# Altium PCB CANPLC_IO.PcbDoc
Units mm, origin at the board's own origin, x right, y up, seen from the top; angles counter-clockwise.
Board outline 99 x 99 mm, 2 copper layers (Top Layer, Bottom Layer); 136 components, 118 nets, 415 pads, 17 vias.
Unrouted connection lines stored in the file: 137.
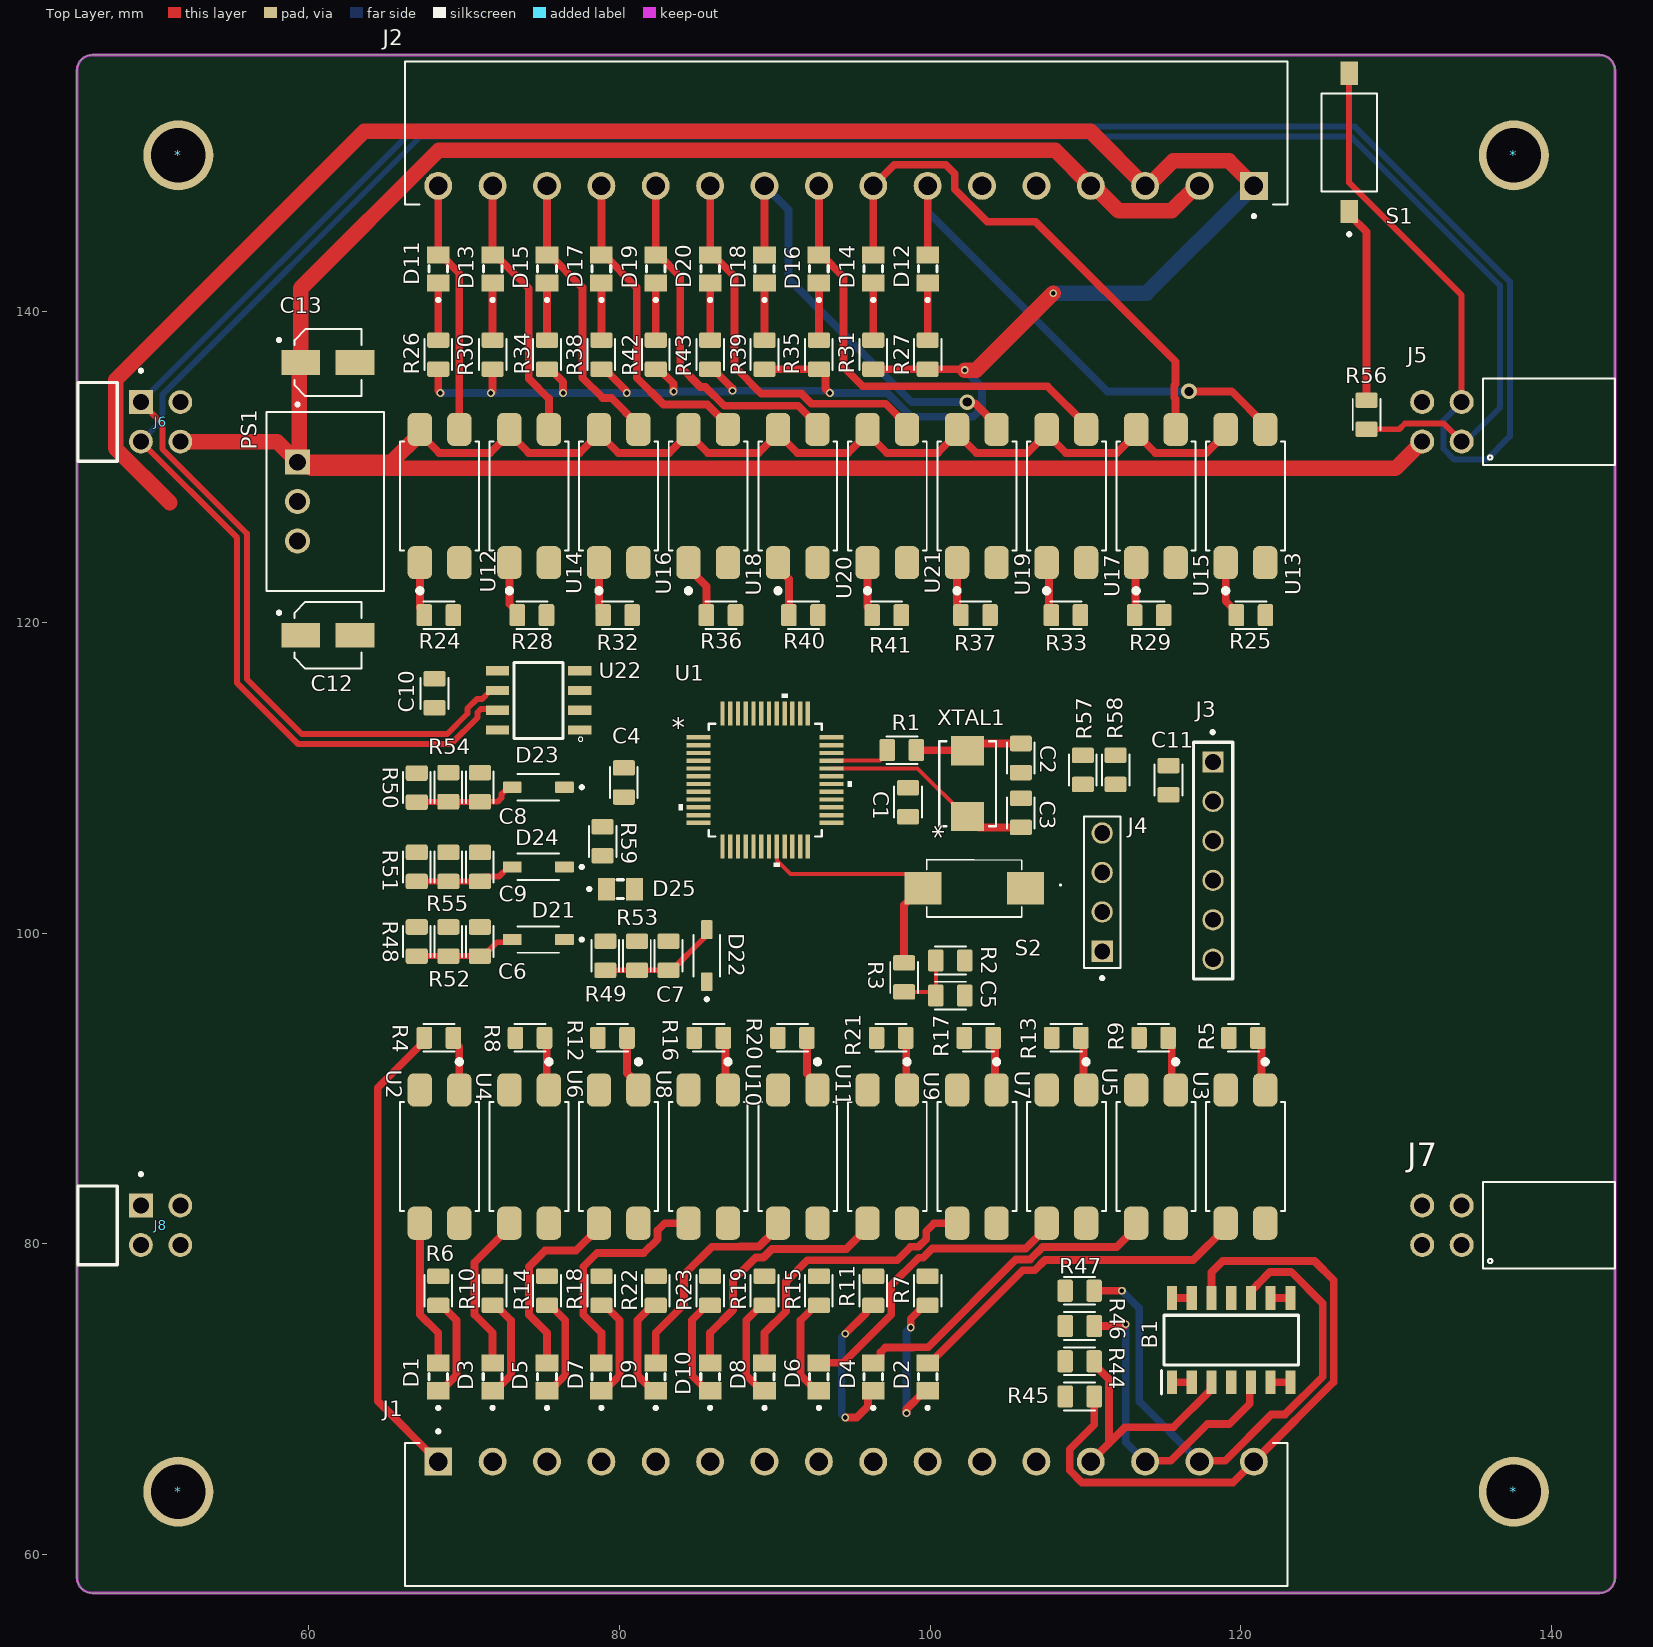
[diagram p0: Top Layer view]
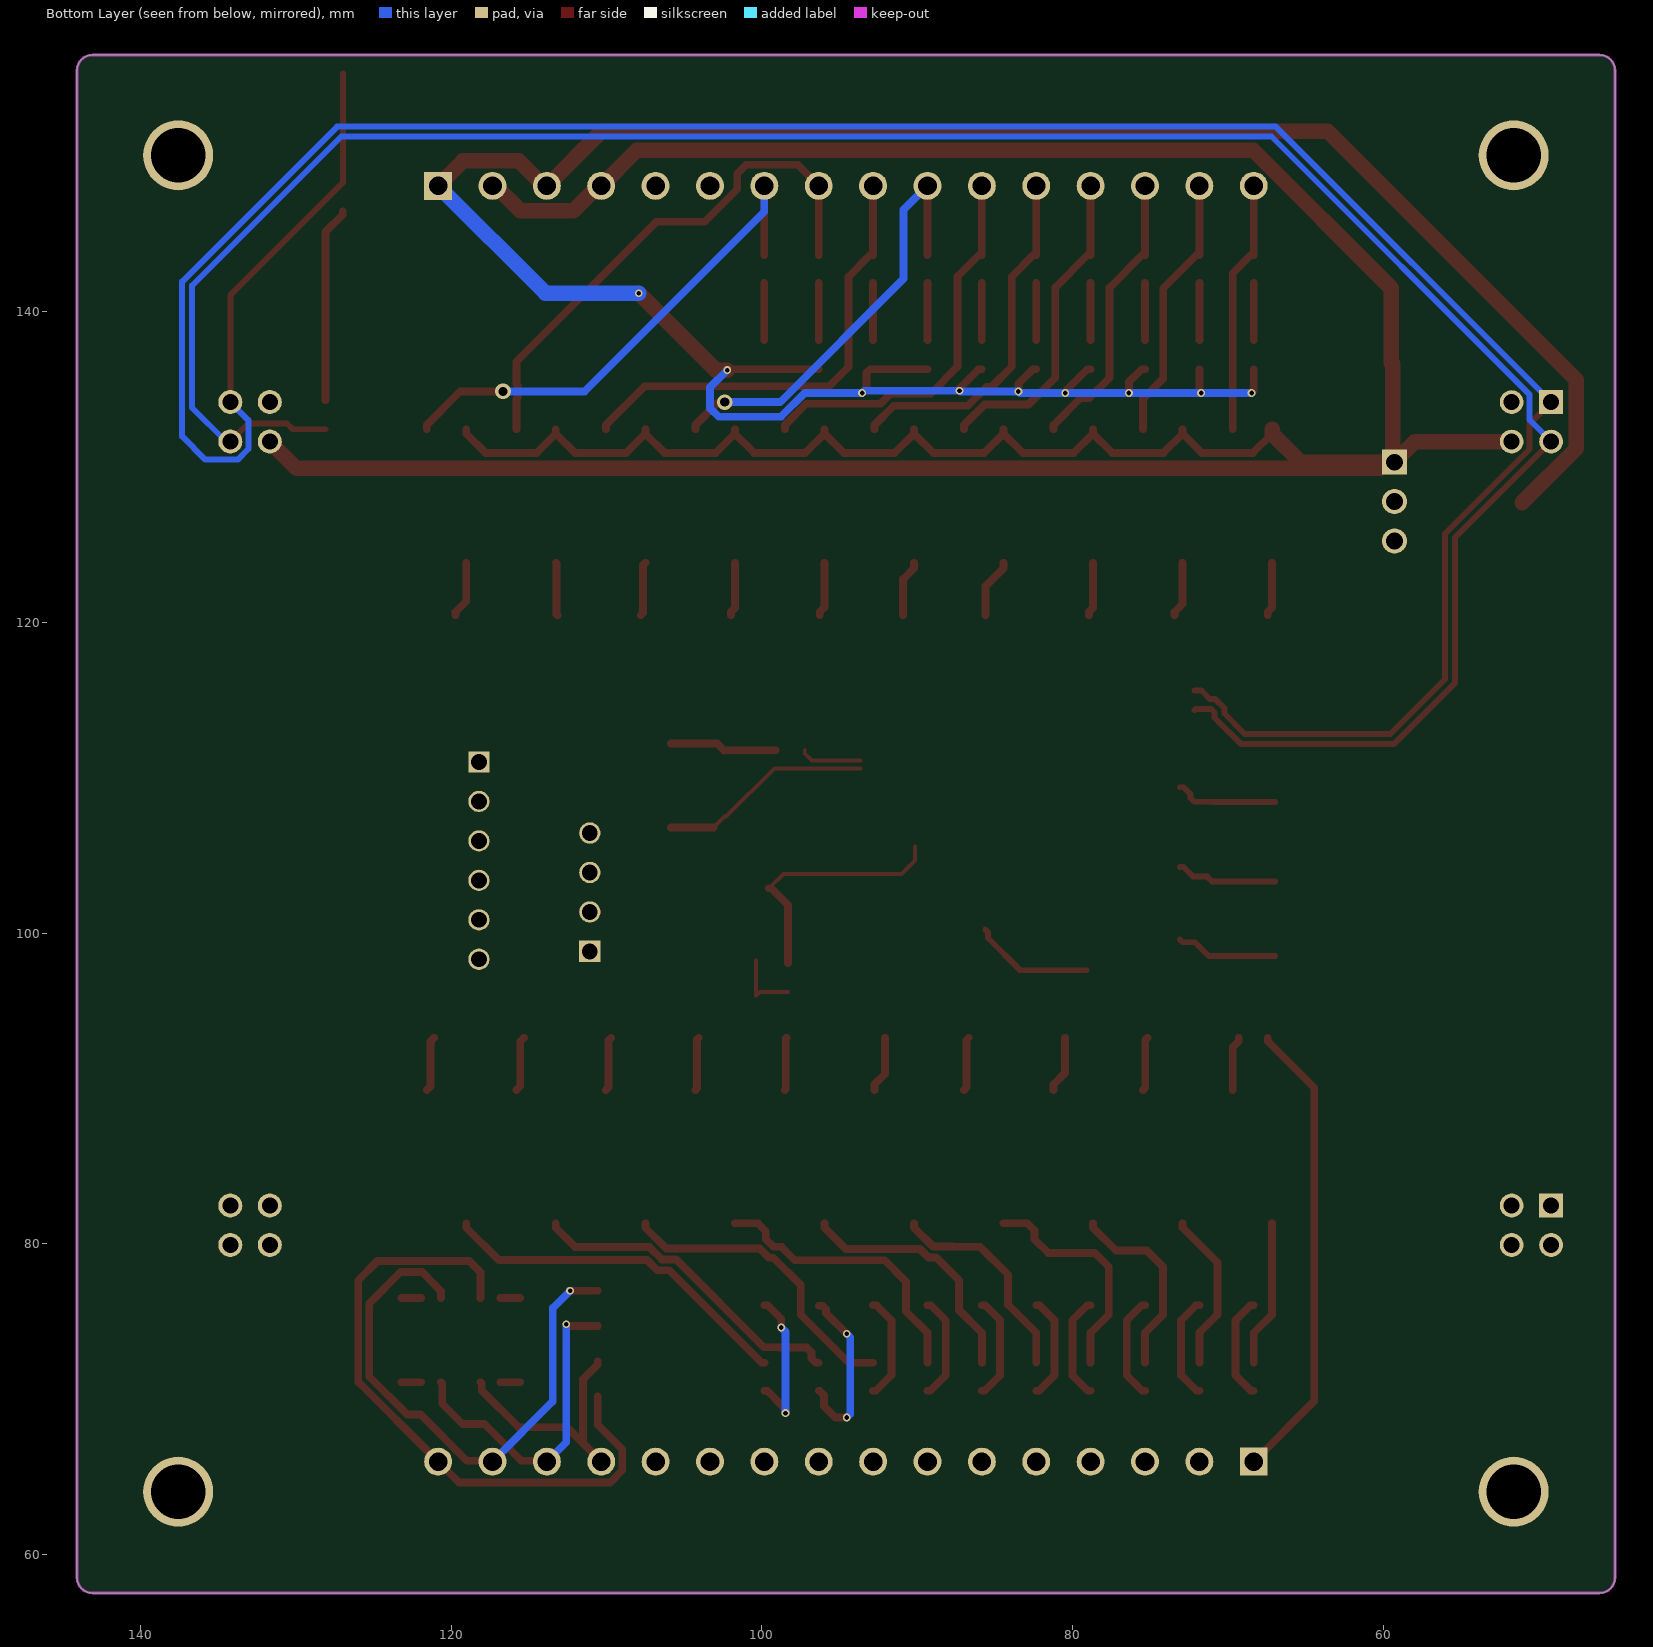
[diagram p1: Bottom Layer view, seen from below]

## Layer stack, top to bottom
Top Solder: solder mask 0.0102, Solder Resist, Dk 3.5
Top Layer: signal copper 0.0356
Dielectric 1: dielectric 0.32, FR-4, Dk 4.8
Bottom Layer: signal copper 0.0356
Bottom Solder: solder mask 0.0102, Solder Resist, Dk 3.5

## Board outline
45.085,58.531 45.085,155.531 cw(c46.085,155.531) 46.085,156.531 143.085,156.531 cw(c143.085,155.531) 144.085,155.531 144.085,58.531 cw(c143.085,58.531) 143.085,57.531 46.085,57.531 cw(c46.085,58.531)

## Design rules (kind name [scope] priority, off if disabled: settings)
Clearance [All] p1: gap=0.2 ignorepadtopadclearanceinfootprint=TRUE
DiffPairsRouting [All] p1: maxlimit=0.254 minlimit=0.254 mostfreqgap=0.254 toplayer_minwidth=0.381 toplayer_maxwidth=0.381 toplayer_prefwidth=0.381 bottomlayer_minwidth=0.381 bottomlayer_maxwidth=0.381 bottomlayer_prefwidth=0.381 maxuncoupledlength=12.7
HoleSize [All] p1: absolutevalues=TRUE maxlimit=6.3 minlimit=0.3 maxpercent=80.000 minpercent=20.000
HoleToHoleClearance [All] p1: gap=0.5 allowstackedmicrovias=TRUE
PolygonConnect [All] p1: connectstyle=Relief reliefconductorwidth=0.254 reliefentries=4 polygonreliefangle="90 Angle" airgapwidth=0.254
RoutingVias [All] p1: holewidth=0.6 width=1 viastyle="Through Hole" minholewidth=0.3 minwidth=0.5 maxholewidth=6.3 maxwidth=10
SilkToSilkClearance [All] p1: silktosilkclearance=0
SolderMaskExpansion [All] p1: expansion=0.102 istentingtop=FALSE
UnRoutedNet [All] p1: checkbadconnections=TRUE
Width [All] p1: maxlimit=5 minlimit=0.127 preferedwidth=0.5 minimp=50.000000 maximp=50.000000 favimp=50.000000
25 further rules are at their usual default settings.

## Classes and differential pairs
net class DO[9..0]: DO0 DO1 DO2 DO3 DO4 DO5 DO6 DO7 DO8 DO9
net class DI[9..0]: DI0 DI1 DI2 DI3 DI4 DI5 DI6 DI7 DI8 DI9
net class CDO[9..0]: CDO0 CDO1 CDO2 CDO3 CDO4 CDO5 CDO6 CDO7 CDO8 CDO9
net class CDI[9..0]: CDI0 CDI1 CDI2 CDI3 CDI4 CDI5 CDI6 CDI7 CDI8 CDI9
net class CAI[3..0]: CAI0 CAI1 CAI2 CAI3
net class ADC[2..0]: ADC0 ADC1 ADC2
component class Power: C12 C13 PS1
component class PIC18F56Q83: C1 C2 C3 C4 C5 D25 R1 R2 R3 R59 S2 U1 XTAL1
component class "Digital Outputs": D11 D12 D13 D14 D15 D16 D17 D18 D19 D20 R24 R25 R26 R27 R28 R29 R30 R31 R32 R33 R34 R35 R36 R37 R38 R39 R40 R41 R42 R43 U12 U13 U14 U15 U16 U17 U18 U19 U20 U21
component class "Digital Inputs": D1 D2 D3 D4 D5 D6 D7 D8 D9 D10 R4 R5 R6 R7 R8 R9 R10 R11 R12 R13 R14 R15 R16 R17 R18 R19 R20 R21 R22 R23 U2 U3 U4 U5 U6 U7 U8 U9 U10 U11
component class Connectors: * C11 J1 J2 J3 J4 J5 J6 J7 J8 R56 R57 R58 S1
component class "CAN Communication": C10 U22
component class "Analog Inputs": B1 C6 C7 C8 C9 D21 D22 D23 D24 R44 R45 R46 R47 R48 R49 R50 R51 R52 R53 R54 R55
differential pair CAN: +CAN_P -CAN_N

## Components (designator, comment, footprint, x,y, rotation, side; value= is the part's Value field where it differs from the comment)
* "M3 Mounting Hole" "M3 - Mounting Hole"#1 137.871,62.306 r0 top
* "M3 Mounting Hole" "M3 - Mounting Hole"#2 51.689,148.666 r0 top
* "M3 Mounting Hole" "M3 - Mounting Hole"#3 135.89,148.869 r0 top
* "M3 Mounting Hole" "M3 - Mounting Hole"#4 53.772,65.913 r0 top
B1 "OPA4991QDRQ1" OPA4991QDRQ1 119.38,73.812 r90 top
C1 "0.1uF" 0805 98.577,108.433 r90 top
C2 "20pF" 0805 105.842,111.277 r270 top
C3 "20pF" 0805 105.842,107.747 r90 top
C4 "0.1uF" 0805 80.289,109.703 r90 top
C5 "0.1uF" 0805 101.3,95.987 r180 top
C6 "0.1uF" 0805 71.019,99.466 r270 top
C7 "0.1uF" 0805 83.16,98.552 r270 top
C8 "0.1uF" 0805 71.019,109.398 r270 top
C9 "0.1uF" 0805 71.019,104.267 r270 top
C10 "0.1uF" 0805 68.097,115.443 r90 top
C11 "0.1uF" 0805 115.341,109.855 r270 top
C12 "47uF 4x5.4" "Electrolytic 4x5.4" 61.239,119.177 r0 top
C13 "47uF 4x5.4" "Electrolytic 4x5.4" 61.239,136.728 r0 top
D1 "LED 0805" "LED 0805" 68.339,71.45 r90 top locked
D2 "LED 0805" "LED 0805" 99.839,71.45 r90 top locked
D3 "LED 0805" "LED 0805" 71.839,71.45 r90 top locked
D4 "LED 0805" "LED 0805" 96.339,71.45 r90 top locked
D5 "LED 0805" "LED 0805" 75.339,71.45 r90 top locked
D6 "LED 0805" "LED 0805" 92.839,71.45 r90 top locked
D7 "LED 0805" "LED 0805" 78.839,71.45 r90 top locked
D8 "LED 0805" "LED 0805" 89.339,71.45 r90 top locked
D9 "LED 0805" "LED 0805" 82.339,71.45 r90 top locked
D10 "LED 0805" "LED 0805" 85.839,71.45 r90 top locked
D11 "LED 0805" "LED 0805" 68.34,142.762 r90 top locked
D12 "LED 0805" "LED 0805" 99.84,142.762 r90 top locked
D13 "LED 0805" "LED 0805" 71.84,142.762 r90 top locked
D14 "LED 0805" "LED 0805" 96.34,142.762 r90 top locked
D15 "LED 0805" "LED 0805" 75.34,142.762 r90 top locked
D16 "LED 0805" "LED 0805" 92.84,142.762 r90 top locked
D17 "LED 0805" "LED 0805" 78.84,142.762 r90 top locked
D18 "LED 0805" "LED 0805" 89.34,142.762 r90 top locked
D19 "LED 0805" "LED 0805" 82.34,142.762 r90 top locked
D20 "LED 0805" "LED 0805" 85.84,142.762 r90 top locked
D21 "5Vz" SOD123 74.778,99.593 r180 top
D22 "5Vz" SOD123 85.624,98.552 r90 top
D23 "5Vz" SOD123 74.778,109.398 r180 top
D24 "5Vz" SOD123 74.778,104.267 r180 top
D25 "LED 0805" "LED 0805" 80.061,102.845 r0 top
J1 "16P - Right 3.5mm Industrial Connector" "16P - Right 3.5mm Industrial Connector" 66.189,57.989 r0 top locked
J2 "16P - Right 3.5mm Industrial Connector" "16P - Right 3.5mm Industrial Connector" 122.99,156.107 r180 top locked
J3 "6-POS 2.54mm Straight Header" "6-POS 2.54mm Header" 118.212,104.673 r90 top
J4 "4-POS 2.54mm Header" "4-POS 2.54mm Header" 111.074,98.831 r90 top
J5 "2x4-POS 2.54mm Female Header" "2x4-POS 2.54mm Female Header" 132.944,132.918 r90 top locked
J6 "2x4-POS 2.54mm Male Header" "2x4-POS 2.54mm Male Header" 50.47,132.918 r270 top locked
J7 "2x4-POS 2.54mm Female Header" "2x4-POS 2.54mm Female Header" 132.944,81.203 r90 top locked
J8 "2x4-POS 2.54mm Male Header" "2x4-POS 2.54mm Male Header" 50.47,81.203 r270 top locked
PS1 "R-78K5.0-0.5" CONV_R-78K5.0-0.5 61.059,127.787 r270 top
R1 "0805_Resistor" 0805 98.176,111.785 r0 top
R2 "10k" 0805 101.3,98.247 r0 top
R3 "100R" 0805 98.323,97.155 r270 top
R4 "1k" 0805 68.377,93.269 r0 top
R5 "1k" 0805 120.163,93.269 r0 top
R6 "1k" 0805 68.339,76.987 r270 top locked
R7 "1k" 0805 99.839,76.987 r270 top locked
R8 "1k" 0805 74.244,93.269 r0 top
R9 "1k" 0805 114.381,93.269 r0 top
R10 "1k" 0805 71.839,76.987 r270 top locked
R11 "1k" 0805 96.339,76.987 r270 top locked
R12 "1k" 0805 79.553,93.269 r0 top
R13 "1k" 0805 108.763,93.269 r0 top
R14 "1k" 0805 75.339,76.987 r270 top locked
R15 "1k" 0805 92.839,76.987 r270 top locked
R16 "1k" 0805 85.75,93.269 r0 top
R17 "1k" 0805 103.124,93.269 r0 top
R18 "1k" 0805 78.839,76.987 r270 top locked
R19 "1k" 0805 89.339,76.987 r270 top locked
R20 "1k" 0805 91.135,93.269 r0 top
R21 "1k" 0805 97.485,93.269 r0 top
R22 "1k" 0805 82.339,76.987 r270 top locked
R23 "1k" 0805 85.839,76.987 r270 top locked
R24 "220R" 0805 68.377,120.472 r180 top
R25 "220R" 0805 120.65,120.472 r180 top
R26 "1k" 0805 68.34,137.241 r90 top locked
R27 "1k" 0805 99.84,137.241 r90 top locked
R28 "220R" 0805 74.371,120.472 r180 top
R29 "220R" 0805 114.097,120.472 r180 top
R30 "1k" 0805 71.84,137.241 r90 top locked
R31 "1k" 0805 96.34,137.241 r90 top locked
R32 "220R" 0805 79.883,120.472 r180 top
R33 "220R" 0805 108.737,120.472 r180 top
R34 "1k" 0805 75.34,137.241 r90 top locked
R35 "1k" 0805 92.84,137.241 r90 top locked
R36 "220R" 0805 86.538,120.472 r180 top
R37 "220R" 0805 102.921,120.472 r180 top
R38 "1k" 0805 78.84,137.241 r90 top locked
R39 "1k" 0805 89.34,137.241 r90 top locked
R40 "220R" 0805 91.846,120.472 r180 top
R41 "220R" 0805 97.206,120.472 r180 top
R42 "1k" 0805 82.34,137.241 r90 top locked
R43 "1k" 0805 85.84,137.241 r90 top locked
R44 "100k" 0805 109.627,72.449 r180 top
R45 "100k" 0805 109.627,70.18 r0 top
R46 "100k" 0805 109.627,74.718 r0 top
R47 "100k" 0805 109.627,76.987 r0 top
R48 "10k" 0805 66.955,99.466 r90 top
R49 "10k" 0805 79.096,98.552 r90 top
R50 "10k" 0805 66.955,109.372 r90 top
R51 "10k" 0805 66.955,104.267 r90 top
R52 "10k" 0805 68.987,99.466 r270 top
R53 "10k" 0805 81.128,98.552 r270 top
R54 "10k" 0805 68.987,109.398 r270 top
R55 "10k" 0805 68.987,104.267 r270 top
R56 "120R" 0805 128.092,133.375 r270 top
R57 "0805_Resistor" 0805 109.83,110.511 r270 top
R58 "0805_Resistor" 0805 111.938,110.515 r270 top
R59 "0805_Resistor" 0805 78.918,105.918 r90 top
S1 "DIP Switch 1 POS" "DIP Switch 1 POS" 126.975,150.901 r90 top
S2 "SPST Button" "SPST Button" 102.845,102.895 r180 top
U1 "PIC18F56Q83-IPT" PIC18F56Q83-IPT 89.383,109.855 r0 top
U2 "PC817" PC817 68.428,85.623 r270 top locked
U3 "PC817" PC817 120.294,85.623 r270 top locked
U4 "PC817" PC817 74.191,85.623 r270 top locked
U5 "PC817" PC817 114.531,85.623 r270 top locked
U6 "PC817" PC817 79.954,85.623 r270 top locked
U7 "PC817" PC817 108.768,85.623 r270 top locked
U8 "PC817" PC817 85.717,85.623 r270 top locked
U9 "PC817" PC817 103.005,85.623 r270 top locked
U10 "PC817" PC817 91.48,85.623 r270 top locked
U11 "PC817" PC817 97.242,85.623 r270 top locked
U12 "PC817" PC817 68.428,128.143 r90 top locked
U13 "PC817" PC817 120.294,128.143 r90 top locked
U14 "PC817" PC817 74.191,128.143 r90 top locked
U15 "PC817" PC817 114.531,128.143 r90 top locked
U16 "PC817" PC817 79.954,128.143 r90 top locked
U17 "PC817" PC817 108.768,128.143 r90 top
U18 "PC817" PC817 85.717,128.143 r90 top locked
U19 "PC817" PC817 103.005,128.143 r90 top
U20 "PC817" PC817 91.48,128.143 r90 top locked
U21 "PC817" PC817 97.242,128.143 r90 top locked
U22 "MCP2562-E/SN" MCP2562-E/SN 74.803,114.986 r180 top
XTAL1 "8MHz" "Crystal 8MHz" 102.413,109.626 r90 top

## Footprints (in the part's own frame and the unit in brackets; to place one, negate y for a bottom-side part, rotate by r counter-clockwise, add the part's x,y. Pads: shape width x height; smd on the part's side, far side on the other; paste and mask are expansions set on the pad)
"2x4-POS 2.54mm Female Header" [mm]
  round 1.545 hole 1.03: 1(-1.27,-1.27) 2(-1.27,1.27) 3(1.27,-1.27) 4(1.27,1.27)
  silkscreen extent -2.79,-11.13 2.79,-2.63, body extent -2.79,-11.15 2.79,1.45, height 5.02
"2x4-POS 2.54mm Male Header" [mm]
  rect 1.53x1.53 / inner round 1.53 / far side rect 1.53x1.53 hole 1.02: 1(-1.27,-1.27)
  round 1.53 hole 1.02: 2(-1.27,1.27) 3(1.27,-1.27) 4(1.27,1.27)
  silkscreen extent -3.39,-5.33 2.54,-1.17, body extent -2.59,-11.18 2.49,1.59, height 6.15
"4-POS 2.54mm Header" [mm]
  rect 1.37x1.37 hole 1.02: 1(0,0)
  round 1.37 hole 1.02: 2(2.54,0) 3(5.08,0) 4(7.62,0)
  silkscreen extent -1.82,-1.17 8.69,1.17
"6-POS 2.54mm Header" [mm]
  rect 1.37x1.37 / inner round 1.37 / far side rect 1.37x1.37 hole 1.02: 01(6.35,0)
  round 1.37 hole 1.02: 02(3.81,0) 03(1.27,0) 04(-1.27,0) 05(-3.81,0) 06(-6.35,0)
  silkscreen extent -7.62,-1.27 8.37,1.27
"16P - Right 3.5mm Industrial Connector" [mm]
  rect 1.8x1.8 / inner round 1.8 / far side rect 1.8x1.8 hole 1.2: 1(2.15,8)
  round 1.8 hole 1.2: 2(5.65,8) 3(9.15,8) 4(12.65,8) 5(16.15,8) 6(19.65,8) 7(23.15,8) 8(26.65,8) 9(30.15,8) 10(33.65,8) 11(37.15,8) 12(40.65,8) 13(44.15,8) 14(47.65,8) 15(51.15,8) 16(54.65,8)
  silkscreen extent 0,0 56.8,10.05, body extent -1.4,-0.03 58.2,9.17, height 7.25
0805 [mm]
  rrect25% 1x1.42 smd: 1(-0.935,0) 2(0.935,0)
  silkscreen extent -1,-0.89 1,0.89, body extent -1,-0.63 1,0.63, height 0.6
CONV_R-78K5.0-0.5 [mm]
  rect 1.605x1.605 / inner round 1.605 / far side rect 1.605x1.605 hole 1.07: 1(-2.54,-1.775)
  round 1.605 hole 1.07: 2(0,-1.775) 3(2.54,-1.775)
  silkscreen extent -6.35,-3.77 5.75,3.77, body extent -5.75,-3.77 5.75,3.77, height 10.2
"Crystal 8MHz" [mil] "5032"
  rect 74x83 smd paste+0 mask+0: 1(-83.5,0) 2(83.5,0)
  silkscreen extent -108,-72 108,72
"DIP Switch 1 POS" [mm]
  rect 1.5x1.1 smd: 1(-4.45,0) 2(4.45,0)
  silkscreen extent -6.01,-1.79 3.15,1.79, body extent -4.9,-1.79 4.9,1.79, height 3.13
"Electrolytic 4x5.4" [mm]
  rect 2.5x1.6 smd: 1(-1.75,0) 2(1.75,0)
  silkscreen extent -3.25,-2.15 2.15,2.15, body extent -2.5,-2.15 2.5,2.15, height 5.78
"LED 0805" [mm]
  rect 1.1x1.45 smd: A(0.9,0) C(-0.9,0)
  silkscreen extent -2.1,-0.6 0.2,0.6, body extent -1,-0.63 1,0.63, height 0.7
"M3 - Mounting Hole"#1 [mm]
  round 4.5 / inner round 1.524 / far side round 4.5 hole 3.5: 1(-0.302,1.75)
"M3 - Mounting Hole"#2 [mm]
  round 4.5 / inner round 1.524 / far side round 4.5 hole 3.5: 1(-0.079,1.4)
"M3 - Mounting Hole"#3 [mm]
  round 4.5 / inner round 1.524 / far side round 4.5 hole 3.5: 1(1.679,1.197)
"M3 - Mounting Hole"#4 [mm]
  round 4.5 / inner round 1.524 / far side round 4.5 hole 3.5: 1(-2.162,-1.857)
MCP2562-E/SN [mm]
  rect 1.5x0.6 smd: 1(-2.65,1.905) 2(-2.65,0.635) 3(-2.65,-0.635) 4(-2.65,-1.905) 5(2.65,-1.905) 6(2.65,-0.635) 7(2.65,0.635) 8(2.65,1.905)
  silkscreen extent -2.84,-2.45 1.58,2.64
OPA4991QDRQ1 [mm]
  rect 1.525x0.65 smd: 1(-2.712,3.81) 2(-2.712,2.54) 3(-2.712,1.27) 4(-2.712,0) 5(-2.712,-1.27) 6(-2.712,-2.54) 7(-2.712,-3.81) 8(2.712,-3.81) 9(2.712,-2.54) 10(2.712,-1.27) 11(2.712,0) 12(2.712,1.27) 13(2.712,2.54) 14(2.712,3.81)
  silkscreen extent -3.47,-4.33 1.6,4.48, body extent -3.14,-4.33 2.89,4.33, height 1.75
PC817 [mm]
  rrect50% 2.13x1.57 smd: 1(-4.29,1.27) 2(-4.29,-1.27) 3(4.29,-1.27) 4(4.29,1.27)
  silkscreen extent -6.25,-2.54 3.5,2.54, body extent -4.87,-2.29 4.87,2.29, height 4
PIC18F56Q83-IPT [mil]
  rect 61x11 smd paste+0 mask+0: 1(-168.5,108.27) 2(-168.5,88.58) 3(-168.5,68.9) 4(-168.5,49.21) 5(-168.5,29.53) 6(-168.5,9.84) 7(-168.5,-9.84) 8(-168.5,-29.53) 9(-168.5,-49.21) 10(-168.5,-68.9) 11(-168.5,-88.58) 12(-168.5,-108.27) 25(168.5,-108.27) 26(168.5,-88.58) 27(168.5,-68.9) 28(168.5,-49.21) 29(168.5,-29.53) 30(168.5,-9.84) 31(168.5,9.84) 32(168.5,29.53) 33(168.5,49.21) 34(168.5,68.9) 35(168.5,88.58) 36(168.5,108.27)
  rect 11x61 smd paste+0 mask+0: 13(-108.27,-168.5) 14(-88.58,-168.5) 15(-68.9,-168.5) 16(-49.21,-168.5) 17(-29.53,-168.5) 18(-9.84,-168.5) 19(9.84,-168.5) 20(29.53,-168.5) 21(49.21,-168.5) 22(68.9,-168.5) 23(88.58,-168.5) 24(108.27,-168.5) 37(108.27,168.5) 38(88.58,168.5) 39(68.9,168.5) 40(49.21,168.5) 41(29.53,168.5) 42(9.84,168.5) 43(-9.84,168.5) 44(-29.53,168.5) 45(-49.21,168.5) 46(-68.9,168.5) 47(-88.58,168.5) 48(-108.27,168.5)
  silkscreen extent -219,-219 219,219, body extent -177,-177 177,177, height 47
SOD123 [mm]
  rrect18% 1.21x0.73 smd: 1(1.68,0) 2(-1.68,0)
  silkscreen extent -2.9,-0.85 1.35,0.85, body extent -1.83,-0.77 1.83,0.77, height 1.45
"SPST Button" [mm] "3mmx6mm"
  rect 2.4x2.1 smd: 1(-3.3,0) 2(3.3,0)
  silkscreen extent -5.6,-1.85 3.05,1.85, body extent -4.29,-1.85 4.29,1.85, height 2.8

## Part data
B1: "Operational Amplifiers - Op Amps Automotive-grade, quad, 40-V, 4.5-MHz, low-power operational amplifier", Manufacturer_Name="Texas Instruments", Mouser Part Number=595-OPA4991QDRQ1, Datasheet Link=https://www.ti.com/lit/ds/symlink/opa4991-q1.pdf?ts=1681108583924&ref_url=https%253A%252F%252Fwww.ti.com%252Fsitesearch%252Fen-us%252Fdocs%252Funiversalsearch.tsp%253FlangPref%253Den-US%2526searchTerm%253DOPA4991QDRQ1%2526nr%253D8, Geometry.Height=1.75mm, Manufacturer_Part_Number=OPA4991QDRQ1, Mouser Price/Stock=https://www.mouser.co.uk/ProductDetail/Texas-Instruments/OPA4991QDRQ1?qs=Rp5uXu7WBW8O3FoPRuKIAQ%3D%3D
C1 C2 C3 C4 C5 C6 C7 C8 C9 C10 C11: library part 0805_Capacitor, Package="0805 AVX", Availability="In Stock", Check_prices=https://www.snapeda.com/parts/LD051A121KAB2A/AVX/view-part/?ref=eda, MF=AVX, MP=LD051A121KAB2A, Price=None, Purchase-URL=https://pricing.snapeda.com/search/part/LD051A121KAB2A/?ref=eda, SnapEDA_Link=https://www.snapeda.com/parts/LD051A121KAB2A/AVX/view-part/?ref=snap
C12 C13: library part "Electrolytic 4x5.4", Package="RADIAL-2 Panasonic", Availability="In Stock", Check_prices=https://www.snapeda.com/parts/EEE-HA1E100WR/Panasonic/view-part/778519/?ref=eda, MF=Panasonic, MP=EEE-HA1E100WR, Price=None, Purchase-URL=https://pricing.snapeda.com/search/part/EEE-HA1E100WR/?ref=eda, SnapEDA_Link=https://www.snapeda.com/parts/EEE-HA1E100WR/Panasonic/view-part/778519/?ref=snap
D1 D2 D3 D4 D5 D6 D7 D8 D9 D10 D11 D12 D13 D14 D15 D16 D17 D18 D19 D20 D25: "LED Uni-Color Green 4-Pin Chip 0805 T/R", Package=None, Availability=Unavailable, MP=597-3305-607F, Price=None
D21 D22 D23 D24: library part "SOD123 - Zener Diode", Package="SMA-2 Taiwan Semiconductor", Availability="In Stock", Check_prices=https://www.snapeda.com/parts/1SMA5926/Taiwan+Semiconductor/view-part/?ref=eda, MF="Taiwan Semiconductor", MP=1SMA5926, Price=None, Purchase-URL=https://pricing.snapeda.com/search/part/1SMA5926/?ref=eda, SnapEDA_Link=https://www.snapeda.com/parts/1SMA5926/Taiwan+Semiconductor/view-part/?ref=snap
J1 J2 J4 J5 J6 J7 J8 S1: Package=None, Price=None
  J1 J2: Availability=Unavailable, MF="{'manufacturer': u'Phoenix Contact'}", MP=1731811
  J4: Availability=Unavailable, MP=5-146290-4
  J5 J6 J7 J8: Availability=Unavailable, Check_prices=https://www.snapeda.com/parts/613004243121/W%C3%BCrth%20Elektronik/view-part/1737074/?ref=eda, MF="WÃ¼rth Elektronik", MP=613004243121, SnapEDA_Link=https://www.snapeda.com/parts/613004243121/W%C3%BCrth%20Elektronik/view-part/1737074/?ref=snap
  S1: Availability="In Stock", Check_prices=https://www.snapeda.com/parts/KAE01SGGT/E-Switch/view-part/?ref=eda, MF=E-Switch, MP=KAE01SGGT, Purchase-URL=https://pricing.snapeda.com/search/part/KAE01SGGT/?ref=eda, SnapEDA_Link=https://www.snapeda.com/parts/KAE01SGGT/E-Switch/view-part/?ref=snap
J3: "HEADER, 6 CONTACTS, 1 ROW, THROUGH HOLE, 2.54 MM; Connector Systems:Board-to-Board; Pitch Spacing:2.54mm; No. of Rows:1Rows; No. of Contacts:6Contacts; Contact Termination Type:Through Hole Right Angle; Product Range:HTSW Series RoHS Compliant: Yes", Package=None, Availability="In Stock", Check_prices=https://www.snapeda.com/parts/HTSW10608SSLA/Samtec/view-part/?ref=eda, MF=Samtec, MP=HTSW10608SSLA, Price=None, Purchase-URL=https://pricing.snapeda.com/search/part/HTSW10608SSLA/?ref=eda, SnapEDA_Link=https://www.snapeda.com/parts/HTSW10608SSLA/Samtec/view-part/?ref=snap
PS1: "0.5A DC/DC-Converter 'INNOLINE' SIP3 reg", Package=None, Availability="In Stock", Check_prices=https://www.snapeda.com/parts/R-78K5.0-0.5/Recom+Power/view-part/?ref=eda, MF="Recom Power", MP=R-78K5.0-0.5, Price=None, Purchase-URL=https://pricing.snapeda.com/search/part/R-78K5.0-0.5/?ref=eda, SnapEDA_Link=https://www.snapeda.com/parts/R-78K5.0-0.5/Recom+Power/view-part/?ref=snap
R1 R57 R58 R59: Package=0805, Power_Rating=".25 W", Resistance=.33, Tolerance=1%, Availability="In Stock", Check_prices=https://www.snapeda.com/parts/2-2176053-0/TE+Connectivity/view-part/?ref=eda, EU_RoHS_Compliance="Compliant with Exemptions", MF="TE Connectivity", MP=2-2176053-0, Price=None, SnapEDA_Link=https://www.snapeda.com/parts/2-2176053-0/TE+Connectivity/view-part/?ref=snap
R2 R3 R4 R5 R6 R7 R8 R9 R10 R11 R12 R13 R14 R15 R16 R17 R18 R19 R20 R21 R22 R23 R24 R25 R26 R27 R28 R29 R30 R31 R32 R33 R34 R35 R36 R37 R38 R39 R40 R41 R42 R43 R44 R45 R46 R47 R48 R49 R50 R51 R52 R53 R54 R55 R56: library part 0805_Resistor, Package=0805, Power_Rating=".25 W", Resistance=.33, Tolerance=1%, Availability="In Stock", Check_prices=https://www.snapeda.com/parts/2-2176053-0/TE+Connectivity/view-part/?ref=eda, EU_RoHS_Compliance="Compliant with Exemptions", MF="TE Connectivity", MP=2-2176053-0, Price=None, SnapEDA_Link=https://www.snapeda.com/parts/2-2176053-0/TE+Connectivity/view-part/?ref=snap
S2: "3mmX6mm", Package=None, Availability=Unavailable, MP=B3U-1000P, Price=None
U1: "No Description Available", Mfr_Name=Microchip, RefDes=RefDes, Type=Type
U2 U3 U4 U5 U6 U7 U8 U9 U10 U11 U12 U13 U14 U15 U16 U17 U18 U19 U20 U21: "Optoisolator Transistor Output 5000Vrms 1 Channel 4-SMD", Package="SMD-4 Sharp Microelectronics", Availability="In Stock", Check_prices=https://www.snapeda.com/parts/PC817XI/Sharp+Microelectronics/view-part/?ref=eda, MF="Sharp Microelectronics", MP=PC817XI, Price=None, Purchase-URL=https://pricing.snapeda.com/search/part/PC817XI/?ref=eda, SnapEDA_Link=https://www.snapeda.com/parts/PC817XI/Sharp+Microelectronics/view-part/?ref=snap
U22: "1/1 Transceiver Half CANbus 8-SOIC", Package="SO-8 Microchip", Availability=Unavailable, MF=Microchip, MP=MCP2562-E/SN, Price=None, SnapEDA_Link=https://www.snapeda.com/parts/MCP2562-E/SN/Microchip/view-part/1055306/?ref=snap
XTAL1: library part "Crystal 8MHz", "5032", Manufacturer_Part_Number=SC32A-12.5PF20PPM, Mfr_Name=Epson, Copyright="Copyright (C) 2024 Ultra Librarian. All rights reserved.", RefDes=RefDes, Type=DEV

## Via types
v1: diameter 0.5, hole 0.3, Top Layer to Bottom Layer, 15 vias
v2: diameter 1, hole 0.6, Top Layer to Bottom Layer, 2 vias

## Nets (pads, with @x,y where several pads share a name; then routed paths per layer and width w, separated by ;. In a path a pad name is that pad's centre, name@x,y a point inside that pad or via, vN(x,y) a via of type N, cw(c..) or ccw(c..) an arc to the next point about the centre after c; other vN are vias at no path point)
+5: C1.1 C4.1 C10.2 C11.1 C12.1 J3.02 J4.1 PS1.3 R2.2 U1.7 U1.30 U2.4 U3.4 U4.4 U5.4 U6.4 U7.4 U8.4 U9.4 U10.4 U11.4 U22.3 U22.5
+24: B1.4 C13.1 J2.2 J2.4 J5.2 J6.4 PS1.1 U12.4 U13.4 U14.4 U15.4 U16.4 U17.4 U18.4 U19.4 U20.4 U21.4 | length 228.8
  Top Layer w0.5: U12.4@67.158,132.153 68.393,130.918 71.686,130.918 U14.4@72.921,132.153 ; U14.4 U14.4@72.921,132.153 ; U16.4 U16.4@78.684,132.153 ; U18.4 U18.4@84.447,132.153 ; U20.4 U20.4@90.21,132.153 ; U21.4 U21.4@95.972,132.153 ; U19.4 U19.4@101.735,132.153 ; U17.4 U17.4@107.498,132.153 ; U15.4 U15.4@113.261,132.153 ; U13.4 119.024,132.153 117.789,130.918 114.496,130.918 U15.4@113.261,132.153 ; U14.4@72.921,132.153 74.156,130.918 77.449,130.918 U16.4@78.684,132.153 ; U16.4@78.684,132.153 79.919,130.918 83.212,130.918 U18.4@84.447,132.153 ; U18.4@84.447,132.153 85.682,130.918 88.975,130.918 U20.4@90.21,132.153 ; U20.4@90.21,132.153 91.445,130.918 94.737,130.918 U21.4@95.972,132.153 ; U21.4@95.972,132.153 97.207,130.918 100.5,130.918 U19.4@101.735,132.153 ; U19.4@101.735,132.153 102.97,130.918 106.263,130.918 U17.4@107.498,132.153 ; U17.4@107.498,132.153 108.733,130.918 112.026,130.918 U15.4@113.261,132.153
  Top Layer w1: J6.4 57.963,131.648 PS1.1 ; PS1.1@59.386,130.43 59.386,136.626 C13.1 59.489,141.519 68.377,150.407 108.04,150.407 J2.4 110.534,148.107 112.134,146.507 115.546,146.507 117.146,148.107 J2.2 ; U12.4 67.158,132.153 65.332,130.327 59.69,130.327 PS1.1 ; J5.2@131.648,131.623 129.947,129.921 60.172,129.921 60.068,130.025 59.586,130.025 PS1.1
ABO0: B1.1 B1.2 R48.2 | length 1.3
  Top Layer w0.5: B1.1 B1.2
ABO1: B1.6 B1.7 R49.2 | length 1.3
  Top Layer w0.5: B1.6 B1.7
ABO2: B1.13 B1.14 R50.2 | length 1.3
  Top Layer w0.5: B1.14 B1.13
ABO3: B1.8 B1.9 R51.2 | length 1.3
  Top Layer w0.5: B1.9 B1.8
ADC0: U1.48
ADC1: U1.47
ADC2: U1.46
ADC3: C9.2 D24.1 R51.1 R55.2 U1.21 | length 6.5
  Top Layer w0.381: R51.1 R55.2 C9.2 71.329,103.642 72.233,103.642 72.858,104.267 D24.1
CAI0: B1.3 J1.13 R44.1 | length 15.8
  Top Layer w0.5: J1.13 111.512,67.162 ; R44.1 110.562,72.239 111.512,71.289 111.512,67.162 ; B1.3 118.035,71.025 118.035,70.572 115.658,68.195 112.545,68.195 111.512,67.162
CAI1: B1.5 J1.14 R46.2 | length 21.1
  Top Layer w0.5: R46.2 112.488,74.718 v1(112.598,74.828) ; J1.14 113.898,66.048 115.489,66.048 117.845,68.405 119.256,68.405 120.575,69.724 120.575,71.025 B1.5
  Bottom Layer w0.5: v1(112.598,74.828) 112.598,67.23 J1.14
CAI2: B1.10 J1.15 R47.2 | length 36.2
  Top Layer w0.5: R47.2 v1(112.344,76.987) ; J1.15 117.398,66.048 118.989,66.048 121.963,69.023 122.836,69.023 125.273,71.459 125.273,76.165 123.236,78.203 121.874,78.203 121.079,77.407 121.079,77.39 120.65,76.962 B1.10
  Bottom Layer w0.5: v1(112.344,76.987) 113.462,75.87 113.462,69.866 J1.15
CAI3: B1.12 J1.16 R45.2 | length 42.4
  Top Layer w0.5: R45.2 110.562,68.362 108.989,66.789 108.989,65.43 109.78,64.639 119.489,64.639 J1.16 121.133,65.989 121.133,66.283 125.973,71.123 125.973,77.671 124.741,78.903 118.831,78.903 118.11,78.181 B1.12
CAN_N: J5.3 J6.1 S1.2 U22.6 | length 182
  Top Layer w0.381: J6.1 50.584,132.804 50.584,131.17 56.032,125.721 56.032,116.357 59.563,112.827 68.91,112.827 70.226,114.143 70.226,114.475 70.821,115.07 71.152,115.07 71.703,115.621 U22.6 ; S1.2 126.975,148.304 134.214,141.065 J5.3
  Bottom Layer w0.381: J6.1 66.929,151.917 127.339,151.917 137.312,141.944 137.312,131.978 135.819,130.485 133.732,130.485 133.051,131.166 133.051,133.025 J5.3
CAN_P: J5.1 J6.3 R56.2 U22.7 | length 156.2
  Top Layer w0.381: J6.3 55.397,125.451 55.397,116.094 59.3,112.192 69.173,112.192 70.861,113.88 70.861,114.212 71.084,114.435 72.069,114.435 U22.7 ; R56.2 130.198,132.44 130.569,132.811 133.051,132.811 J5.1
  Bottom Layer w0.381: J6.3 50.584,133.033 50.584,134.667 67.2,151.282 127.076,151.282 136.677,141.681 136.677,133.833 134.493,131.648 J5.1
CDI0: J1.1 R4.1 | length 30.1
  Top Layer w0.5: R4.1 67.442,93.059 64.44,90.057 64.44,69.888 J1.1
CDI1: J1.2 R8.1
CDI2: J1.3 R12.1
CDI3: J1.4 R16.1
CDI4: J1.5 R20.1
CDI5: J1.6 R21.1
CDI6: J1.7 R17.1
CDI7: J1.8 R13.1
CDI8: J1.9 R9.1
CDI9: J1.10 R5.1
CDO0: D11.A J2.16 U12.3 | length 16.3
  Top Layer w0.5: J2.16 D11.A 68.515,143.662 69.698,142.48 U12.3
CDO1: D13.A J2.15 U14.3 | length 17.3
  Top Layer w0.5: J2.15 D13.A 72.015,143.662 74.165,141.512 74.165,135.708 75.461,134.412 U14.3
CDO2: D15.A J2.14 U16.3 | length 18.5
  Top Layer w0.5: J2.14 D15.A 75.515,143.662 77.62,141.557 77.62,135.753 78.916,134.456 79.48,134.456 81.224,132.713 U16.3
CDO3: D17.A J2.13 U18.3 | length 20.8
  Top Layer w0.5: J2.13 D17.A 79.015,143.662 81.12,141.557 81.12,135.753 82.837,134.036 85.664,134.036 86.987,132.713 U18.3
CDO4: D19.A J2.12 U20.3 | length 23.1
  Top Layer w0.5: J2.12 D19.A 82.515,143.662 83.916,142.261 83.916,136.457 85.216,135.156 85.533,135.156 86.741,133.948 91.515,133.948 92.75,132.713 U20.3
CDO5: D20.A J2.11 U21.3 | length 25.3
  Top Layer w0.5: J2.11 D20.A 86.015,143.662 87.416,142.261 87.416,136.457 89.137,134.736 91.717,134.736 92.366,134.087 97.138,134.087 98.512,132.713 U21.3
CDO6: D18.A J2.10 U19.3 | length 28.6
  Top Layer w0.5: D18.A 89.34,145.245 J2.10 ; v2(102.387,134.188) 102.483,134.093 102.895,134.093 104.275,132.713 U19.3
  Bottom Layer w0.5: J2.10 90.881,146.566 90.881,142.121 98.814,134.188 v2(102.387,134.188)
CDO7: D16.A J2.9 U17.3 | length 29.9
  Top Layer w0.5: J2.9 D16.A 93.015,143.662 94.416,142.261 94.416,136.457 95.669,135.204 107.547,135.204 110.038,132.713 U17.3
CDO8: D14.A J2.8 U15.3 | length 34.7
  Top Layer w0.5: D14.A J2.8 97.69,149.457 101.012,149.457 101.59,148.879 101.59,147.889 103.683,145.796 106.782,145.796 115.801,136.776 115.801,135.357 115.712,135.268 115.712,134.48 115.801,134.391 U15.3
CDO9: D12.A J2.7 U13.3 | length 33.8
  Top Layer w0.5: D12.A J2.7 ; v2(116.662,134.874) 119.403,134.874 121.564,132.713 U13.3
  Bottom Layer w0.5: J2.7 99.84,146.438 111.404,134.874 v2(116.662,134.874)
DI0: D1.A U1.22 U2.3 | length 9.5
  Top Layer w0.5: U2.3 67.158,75.46 68.339,74.279 D1.A
DI1: D3.A U1.23 U4.3 | length 10.4
  Top Layer w0.5: D3.A 71.839,74.279 70.679,75.439 70.679,78.811 72.921,81.053 U4.3
DI2: D5.A U1.24 U6.3 | length 12.5
  Top Layer w0.5: D5.A 75.339,74.279 74.179,75.439 74.179,78.535 75.215,79.571 77.201,79.571 78.684,81.053 U6.3
DI3: D7.A U1.29 U8.3 | length 14.9
  Top Layer w0.5: D7.A 78.839,74.279 77.679,75.439 77.679,78.535 78.567,79.424 81.571,79.424 82.459,80.312 82.459,80.88 82.912,81.333 U8.3
DI4: D9.A U1.28 U10.3 | length 14
  Top Layer w0.5: D9.A 82.339,74.279 84.151,76.09 84.151,78.007 85.962,79.818 87.728,79.818 87.742,79.832 88.989,79.832 90.21,81.053 U10.3
DI5: D10.A U1.27 U11.3 | length 16.3
  Top Layer w0.5: D10.A 85.839,74.279 87.308,75.747 87.308,77.664 88.776,79.132 89.279,79.132 89.826,79.68 94.598,79.68 95.972,81.053 U11.3
DI6: D8.A U1.26 U9.3 | length 18.7
  Top Layer w0.5: D8.A 89.339,74.279 90.731,75.671 90.731,77.587 92.094,78.95 97.874,78.95 98.743,79.818 99.253,79.818 99.747,80.312 99.747,80.823 100.258,81.333 U9.3
DI7: D6.A U1.25 U7.3 | length 19.7
  Top Layer w0.5: D6.A 94.41,72.35 97.499,75.439 97.499,77.355 99.262,79.118 99.543,79.118 100.13,79.705 106.15,79.705 107.498,81.053 U7.3
DI8: D4.A U1.35 U5.3 | length 21
  Top Layer w0.5: D4.A 96.514,72.35 96.814,72.65 96.814,73.035 97.107,73.328 98.906,73.328 98.928,73.35 99.868,73.35 105.523,79.005 106.44,79.005 107.241,79.807 112.014,79.807 113.261,81.053 U5.3
DI9: D2.A U1.34 U3.3 | length 23.1
  Top Layer w0.5: D2.A 100.014,72.35 105.969,78.305 106.73,78.305 107.393,78.969 116.939,78.969 119.024,81.053 U3.3
DO0: R24.1 U1.45
DO1: R28.1 U1.44
DO2: R32.1 U1.43
DO3: R36.1 U1.42
DO4: R40.1 U1.41
DO5: R41.1 U1.40
DO6: R37.1 U1.39
DO7: R33.1 U1.38
DO8: R29.1 U1.37
DO9: R25.1 U1.36
GND: B1.11 C1.2 C2.2 C3.2 C4.2 C5.1 C6.1 C7.1 C8.1 C9.1 C10.1 C11.2 C12.2 C13.2 D21.2 D22.2 D23.2 D24.2 D25.C J3.03 J4.2 J5.4 J6.2 PS1.2 R6.1 R7.1 R10.1 R11.1 R14.1 R15.1 R18.1 R19.1 R22.1 R23.1 R44.2 R45.1 R46.1 R47.1 R52.1 R53.1 R54.1 R55.1 R58.1 S2.1 U1.6 U1.31 U12.2 U13.2 U14.2 U15.2 U16.2 U17.2 U18.2 U19.2 U20.2 U21.2 U22.2 U22.8
GND2: J2.1 J2.3 R26.1 R27.1 R30.1 R31.1 R34.1 R35.1 R38.1 R39.1 R42.1 R43.1 U2.2 U3.2 U4.2 U5.2 U6.2 U7.2 U8.2 U9.2 U10.2 U11.2 | length 177.4
  Top Layer w0.5: R26.1 68.34,134.911 v1(68.478,134.772) ; v1(71.73,134.772) 71.84,134.883 R30.1 ; R34.1 75.55,136.306 76.378,135.478 v1(76.378,134.772) ; R38.1 79.05,136.306 80.467,134.889 v1(80.467,134.772) ; R42.1 82.55,136.306 83.49,135.366 v1(83.49,134.874) ; R43.1 86.05,136.306 87.274,135.082 v1(87.274,134.925) ; R39.1 R35.1 93.015,136.306 93.265,136.056 93.265,135.056 v1(93.548,134.772) ; R31.1 R27.1 102.175,136.306 v1(102.235,136.246)
  Top Layer w1: 51.065,127.711 47.574,131.202 47.574,135.611 63.571,151.607 110.34,151.607 J2.3 114.034,148.107 115.634,149.707 119.24,149.707 J2.1 ; v1(102.235,136.246) 102.972,136.246 v1(107.925,141.199)
  Bottom Layer w0.5: v1(68.478,134.772) v1(71.73,134.772) v1(76.378,134.772) v1(80.467,134.772) 83.388,134.772 v1(83.49,134.874) 87.224,134.874 v1(87.274,134.925) 93.396,134.925 v1(93.548,134.772) 97.24,134.772 98.774,133.238 102.781,133.238 103.337,133.795 103.337,135.143 v1(102.235,136.246)
  Bottom Layer w1: v1(107.925,141.199) 113.931,141.199 J2.1
NetC2_1: C2.1 R1.2 XTAL1.2 | length 6.9
  Top Layer w0.5: R1.2 102.375,111.785 XTAL1.2 102.878,112.212 C2.1
NetC3_1: C3.1 U1.32 XTAL1.1 | length 13.8
  Top Layer w0.254: U1.32 99.199,110.605 102.298,107.505 XTAL1.1 XTAL1.1@103.106,106.812
  Top Layer w0.5: XTAL1.1@103.106,106.812 C3.1
NetC5_2: C5.2 R2.1 R3.2 | length 4.4
  Top Layer w0.254: R3.2 100.131,96.22 C5.2 R2.1
NetC6_2: C6.2 D21.1 R48.1 R52.2 | length 6.6
  Top Layer w0.381: R48.1 R52.2 C6.2 71.229,98.531 72.116,99.419 72.923,99.419 D21.1
NetC7_2: C7.2 D22.1 R49.1 R53.2 | length 7.8
  Top Layer w0.381: R49.1 R53.2 C7.2 83.37,97.617 85.449,99.697 85.449,100.058 D22.1
NetC8_2: C8.2 D23.1 R50.1 R54.2 | length 6.7
  Top Layer w0.381: R50.1 66.968,108.45 71.006,108.45 C8.2 72.163,108.463 72.414,108.714 72.414,108.954 72.858,109.398 D23.1
NetD1_C: D1.C R6.2 | length 6.7
  Top Layer w0.5: D1.C 68.514,70.55 69.514,71.55 69.514,75.087 68.549,76.052 R6.2
NetD2_C: D2.C R7.2 | length 9.7
  Top Layer w0.5: v1(98.476,69.113) 98.476,69.362 99.664,70.55 D2.C ; v1(98.755,74.625) 98.755,75.178 99.629,76.052 R7.2
  Bottom Layer w0.5: v1(98.476,69.113) 98.476,74.346 v1(98.755,74.625)
NetD3_C: D3.C R10.2 | length 6.7
  Top Layer w0.5: D3.C 72.014,70.55 73.014,71.55 73.014,75.087 72.049,76.052 R10.2
NetD4_C: D4.C R11.2 | length 11.2
  Top Layer w0.5: v1(94.539,68.834) 95.275,68.834 95.997,69.556 95.997,70.25 96.297,70.55 D4.C ; v1(94.539,74.219) 95.879,75.559 95.879,75.802 96.096,76.019 R11.2@96.339,76.019
  Bottom Layer w0.5: v1(94.539,68.834) 94.31,69.063 94.31,73.99 v1(94.539,74.219)
NetD5_C: D5.C R14.2 | length 6.7
  Top Layer w0.5: D5.C 75.514,70.55 76.514,71.55 76.514,75.087 75.549,76.052 R14.2
NetD6_C: D6.C R15.2 | length 6.7
  Top Layer w0.5: D6.C 92.664,70.55 91.664,71.55 91.664,75.087 92.629,76.052 R15.2
NetD7_C: D7.C R18.2 | length 6.7
  Top Layer w0.5: D7.C 79.014,70.55 80.014,71.55 80.014,75.087 79.049,76.052 R18.2
NetD8_C: D8.C R19.2 | length 6.7
  Top Layer w0.5: D8.C 89.164,70.55 88.164,71.55 88.164,75.087 89.129,76.052 R19.2
NetD9_C: D9.C R22.2 | length 6.7
  Top Layer w0.5: D9.C 82.164,70.55 81.164,71.55 81.164,75.087 82.129,76.052 R22.2
NetD10_C: D10.C R23.2 | length 6.7
  Top Layer w0.5: D10.C 85.664,70.55 84.664,71.55 84.664,75.087 85.629,76.052 R23.2
NetD11_C: D11.C R26.2 | length 3.7
  Top Layer w0.5: R26.2 D11.C
NetD12_C: D12.C R27.2 | length 3.7
  Top Layer w0.5: R27.2 D12.C
NetD13_C: D13.C R30.2 | length 3.7
  Top Layer w0.5: R30.2 D13.C
NetD14_C: D14.C R31.2 | length 3.7
  Top Layer w0.5: R31.2 D14.C
NetD15_C: D15.C R34.2 | length 3.7
  Top Layer w0.5: R34.2 D15.C
NetD16_C: D16.C R35.2 | length 3.7
  Top Layer w0.5: R35.2 D16.C
NetD17_C: D17.C R38.2 | length 3.7
  Top Layer w0.5: R38.2 D17.C
NetD18_C: D18.C R39.2 | length 3.7
  Top Layer w0.5: R39.2 D18.C
NetD19_C: D19.C R42.2 | length 3.7
  Top Layer w0.5: R42.2 D19.C
NetD20_C: D20.C R43.2 | length 3.7
  Top Layer w0.5: R43.2 D20.C
NetD25_A: D25.A R59.1
NetJ3_01: J3.01 R3.1 S2.2 U1.20 | length 16.4
  Top Layer w0.254: U1.20 90.145,105.562 90.145,104.686 91.012,103.818 98.622,103.818 S2.2
  Top Layer w0.5: R3.1 98.323,101.824 99.395,102.895 S2.2
NetJ3_04: J3.04 U1.19
NetJ3_05: J3.05 U1.18
NetJ4_3: J4.3 U1.11
NetJ4_4: J4.4 R57.2 R58.2
NetJ7_1: J7.1 J8.3
NetJ7_3: J7.3 J8.1
NetR1_1: R1.1 U1.33 | length 4
  Top Layer w0.254: U1.33 96.77,111.105 97.241,111.575 R1.1
NetR4_2: R4.2 U2.1 | length 3.5
  Top Layer w0.5: R4.2 69.312,93.059 69.698,92.673 U2.1
NetR5_2: R5.2 U3.1 | length 3.5
  Top Layer w0.5: R5.2 121.331,93.036 121.331,90.147 U3.1
NetR8_2: R8.2 U4.1 | length 3.5
  Top Layer w0.5: R8.2 75.32,93.128 75.32,90.054 U4.1
NetR9_2: R9.2 U5.1 | length 3.6
  Top Layer w0.5: R9.2 115.558,93.027 115.558,90.156 U5.1
NetR12_2: R12.2 U6.1 | length 3.7
  Top Layer w0.5: R12.2 80.488,91.007 81.224,90.271 U6.1
NetR13_2: R13.2 U7.1 | length 3.5
  Top Layer w0.5: R13.2 109.868,93.099 109.868,90.084 U7.1
NetR16_2: R16.2 U8.1 | length 3.5
  Top Layer w0.5: R16.2 86.836,93.118 86.836,90.064 U8.1
NetR17_2: R17.2 U9.1 | length 3.4
  Top Layer w0.5: R17.2 104.167,93.161 104.167,90.021 U9.1
NetR20_2: R20.2 U10.1 | length 3.6
  Top Layer w0.5: R20.2 92.07,90.95 92.75,90.271 U10.1
NetR21_2: R21.2 U11.1 | length 3.4
  Top Layer w0.5: R21.2 98.466,93.223 98.466,89.959 U11.1
NetR24_2: R24.2 U12.1 | length 3.5
  Top Layer w0.5: U12.1 67.158,120.966 67.442,120.682 R24.2
NetR25_2: R25.2 U13.1 | length 3.7
  Top Layer w0.5: U13.1 119.024,121.373 119.715,120.682 R25.2
NetR28_2: R28.2 U14.1 | length 3.6
  Top Layer w0.5: U14.1 72.921,121.198 73.436,120.682 R28.2
NetR29_2: R29.2 U15.1 | length 3.4
  Top Layer w0.5: R29.2 113.212,120.522 113.212,123.803 U15.1
NetR32_2: R32.2 U16.1 | length 3.5
  Top Layer w0.5: U16.1 78.684,120.946 78.948,120.682 R32.2
NetR33_2: R33.2 U17.1 | length 3.5
  Top Layer w0.5: U17.1 107.65,123.701 107.65,120.624 R33.2
NetR36_2: R36.2 U18.1 | length 3.9
  Top Layer w0.5: U18.1 84.447,123.496 85.603,122.34 R36.2
NetR37_2: R37.2 U19.1 | length 3.5
  Top Layer w0.5: U19.1 101.735,120.933 101.986,120.682 R37.2
NetR40_2: R40.2 U20.1 | length 3.7
  Top Layer w0.5: U20.1 90.21,123.496 90.911,122.794 R40.2
NetR41_2: R41.2 U21.1 | length 3.5
  Top Layer w0.5: U21.1 95.972,120.981 96.271,120.682 R41.2
NetR56_1: R56.1 S1.1 | length 12.6
  Top Layer w0.5: S1.1 126.975,146.251 128.092,145.134 R56.1
NetR57_1: R57.1 U1.10
NetR59_2: R59.2 U1.12
NetU1_8: U1.8 U22.4
NetU1_9: U1.9 U22.1
pads on no net: *.1 J1.11 J1.12 J2.5 J2.6 J3.06 J7.2 J7.4 J8.2 J8.4 U1.1 U1.2 U1.3 U1.4 U1.5 U1.13 U1.14 U1.15 U1.16 U1.17

## Keep-outs
Keep-Out Layer:
  the board outline again, w0.18

## Text inside footprints (layer, text, board x,y; h text height)
J6: Mechanical 13 "PCB Edge" at 45.27,129.908 h1.02 r270
J8: Mechanical 13 "PCB Edge" at 45.27,78.193 h1.02 r270
U1: Top Overlay "*" at 83.376,112.601 h1.27; Mechanical 13 "*" at 85.941,112.22 h1.27
XTAL1: Top Overlay "*" at 101.435,106.07 h1.27 r90; Mechanical 13 "*" at 102.07,107.34 h1.27 r90